# EAGLE board IQModulator_mod (EAGLE 7.6.0)
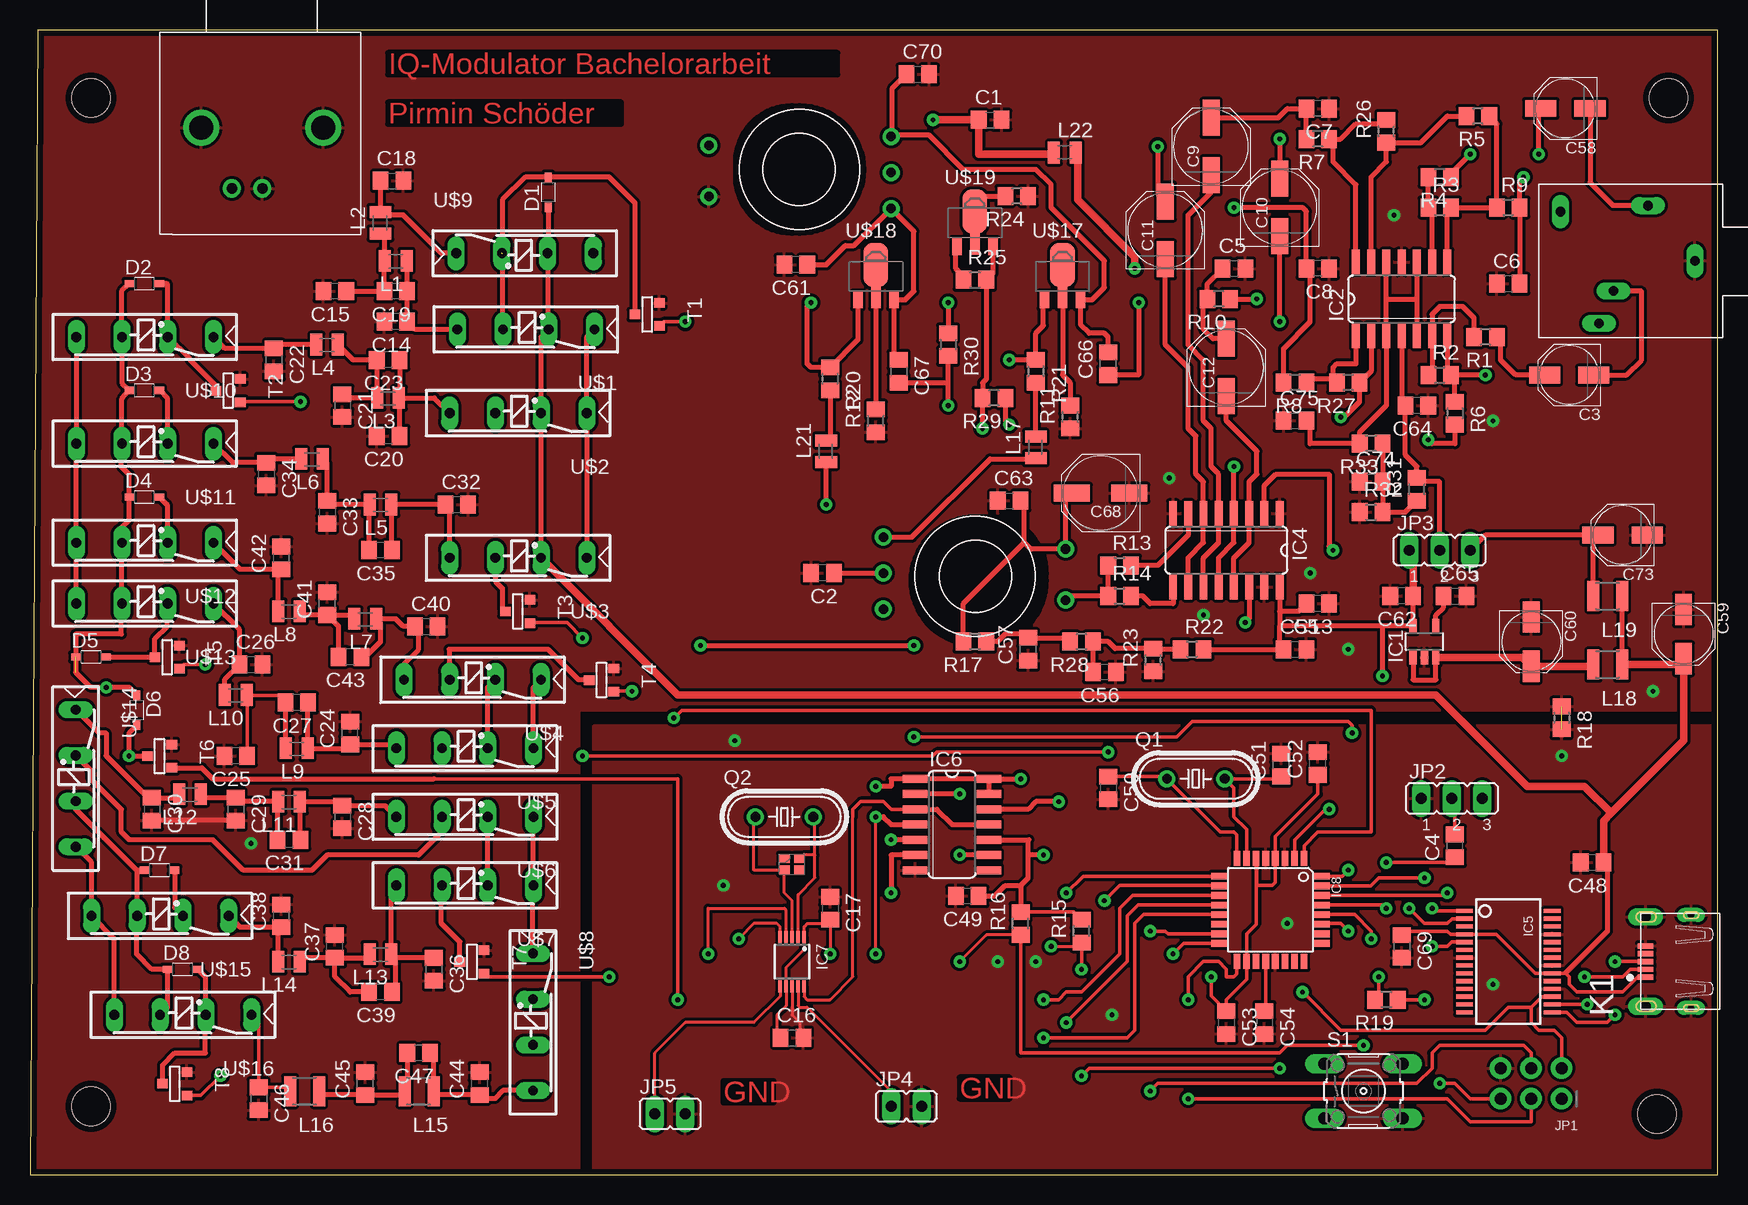
[diagram p0: board, top side]
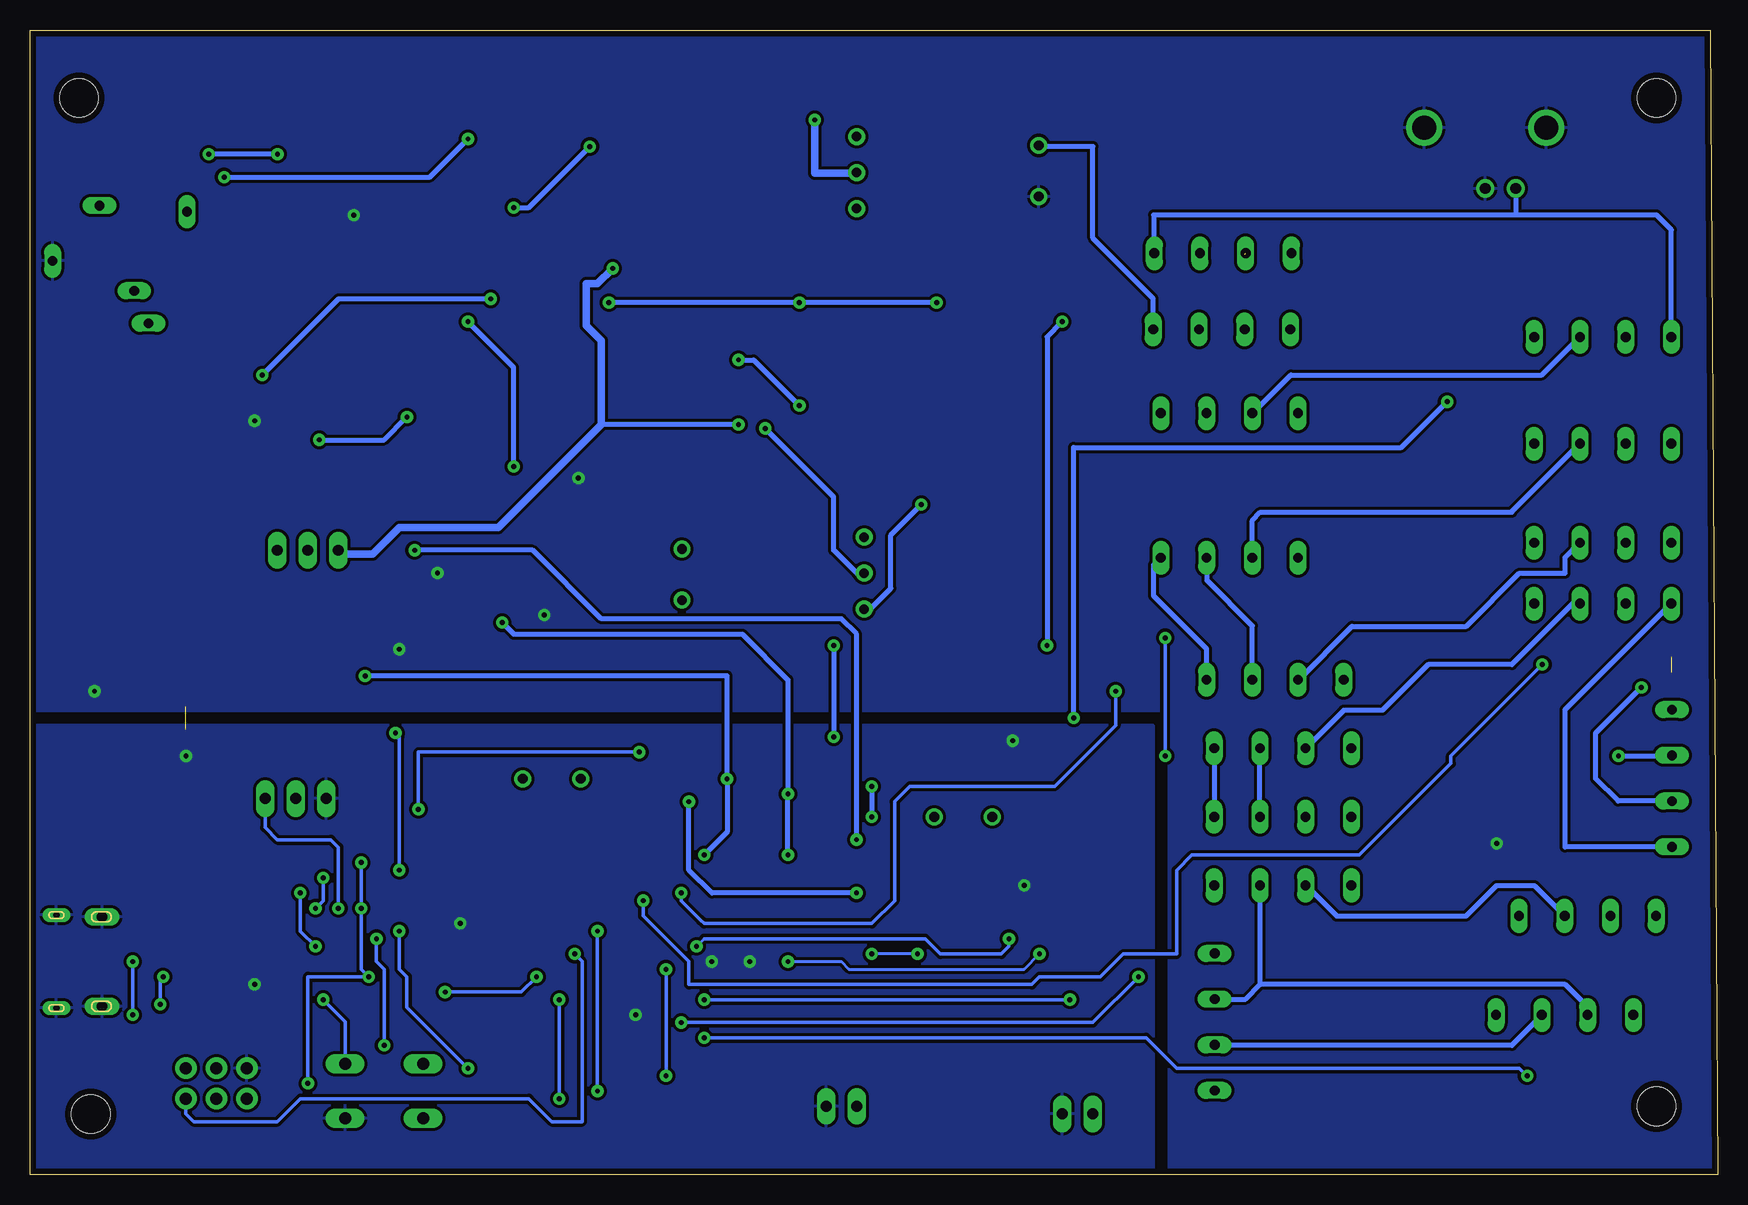
[diagram p1: board, bottom side, seen from below]

Size 140.63 x 95.44 mm. Coordinates in mm from the lower left corner, seen from the top.
Outline: 0,0 140.63,0 140.63,95.44 0.64,95.44 0,0
Copper layers (1*16): Top 0.035mm / dielectric 1.5mm / Bottom 0.035mm
Design rules "LPT_UNIULM *": minimum track width 10mil, minimum drill 16mil, track to track 8mil, track to pad 8mil, pad to pad 8mil, via to via 12mil, smd to smd 0mil, copper to edge 20mil, drill to drill 8mil, minimum pad ring 12mil, minimum via ring 12mil, stop-mask expansion 4mil, vias tented up to drill 0mil, thermal gap 10mil
Holes 3.2 mm at 5.08,5.71 5.08,89.79 136.54,89.79 135.57,5.08
tRestrict: area 59.1,78.7 to 69.2,88.9; area 73.7,44.5 to 84.5,54.6

## Footprints (pad centres in the part's own frame; a part is rotated, then mirrored left to right if it is on the bottom)
C0805 = smd 1.3 x 1.5: 1 -0.95,0; 2 0.95,0
PANASONIC_C = smd 2.6 x 1.4: + 2.05,0; - -2.05,0
PANASONIC_D = smd 3 x 1.4: + 2.4,0; - -2.4,0
SOD323R_INFINEON = smd 0.8 x 0.6: A 1.25,0; C -1.25,0
SOT-23-5 = smd 0.6 x 1.2: 1 -0.95,-1.306; 2 0,-1.306; 3 0.95,-1.306; 4 0.95,1.306; 5 -0.95,1.306
SO14 = smd 0.66 x 2.032: 1 -3.81,-3.073; 2 -2.54,-3.073; 3 -1.27,-3.073; 4 0,-3.073; 5 1.27,-3.073; 6 2.54,-3.073; 7 3.81,-3.073; 8 3.81,3.073; 9 2.54,3.073; 10 1.27,3.073; 11 0,3.073; 12 -1.27,3.073; 13 -2.54,3.073; 14 -3.81,3.073
SO16 = smd 0.66 x 2.032: 1 -4.445,-3.073; 2 -3.175,-3.073; 3 -1.905,-3.073; 4 -0.635,-3.073; 5 0.635,-3.073; 6 1.905,-3.073; 7 3.175,-3.073; 8 4.445,-3.073; 9 4.445,3.073; 10 3.175,3.073; 11 1.905,3.073; 12 0.635,3.073; 13 -0.635,3.073; 14 -1.905,3.073; 15 -3.175,3.073; 16 -4.445,3.073
SSOP28DB = smd 0.348 x 1.397: 1 -4.225,-3.656; 2 -3.575,-3.656; 3 -2.925,-3.656; 4 -2.275,-3.656; 5 -1.625,-3.656; 6 -0.975,-3.656; 7 -0.325,-3.656; 8 0.325,-3.656; 9 0.975,-3.656; 10 1.625,-3.656; 11 2.275,-3.656; 12 2.925,-3.656; 13 3.575,-3.656; 14 4.225,-3.656; 15 4.225,3.656; 16 3.575,3.656; 17 2.925,3.656; 18 2.275,3.656; 19 1.625,3.656; 20 0.975,3.656; 21 0.325,3.656; 22 -0.325,3.656; 23 -0.975,3.656; 24 -1.625,3.656; 25 -2.275,3.656; 26 -2.925,3.656; 27 -3.575,3.656; 28 -4.225,3.656
10-MSOP = smd 0.3 x 1: 1 -1,-2.05; 2 -0.5,-2.05; 3 0,-2.05; 4 0.5,-2.05; 5 1,-2.05; 6 1,2.05; 7 0.5,2.05; 8 0,2.05; 9 -0.5,2.05; 10 -1,2.05
TQFP32-08 = smd 1.27 x 0.559: 1 -4.293,2.8; 2 -4.293,2; 3 -4.293,1.2; 4 -4.293,0.4; 5 -4.293,-0.4; 6 -4.293,-1.2; 7 -4.293,-2; 8 -4.293,-2.8; 17 4.293,-2.8; 18 4.293,-2; 19 4.293,-1.2; 20 4.293,-0.4; 21 4.293,0.4; 22 4.293,1.2; 23 4.293,2; 24 4.293,2.8 | smd 0.559 x 1.27: 9 -2.8,-4.293; 10 -2,-4.293; 11 -1.2,-4.293; 12 -0.4,-4.293; 13 0.4,-4.293; 14 1.2,-4.293; 15 2,-4.293; 16 2.8,-4.293; 25 2.8,4.293; 26 2,4.293; 27 1.2,4.293; 28 0.4,4.293; 29 -0.4,4.293; 30 -1.2,4.293; 31 -2,4.293; 32 -2.8,4.293
2X03_ROUND_70MIL = drill 1 pad 1.778: 1 -2.54,1.27; 2 -2.54,-1.27; 3 0,1.27; 4 0,-1.27; 5 2.54,1.27; 6 2.54,-1.27
JP2 = drill 0.914 long: 1 -2.54,0; 2 0,0; 3 2.54,0
JP1 = drill 0.914 long: 1 0,-1.27; 2 0,1.27
629105150521 = smd 0.45 x 1.3: 1 -1.3,3.8; 2 -0.65,3.8; 3 0,3.8; 4 0.65,3.8; 5 1.3,3.8 | drill 0.85 pad 1.2 long: Z1 -3.725,3.8; Z2 3.725,3.8 | drill 0.55 pad 0.9 long: Z3 3.875,0; Z4 -3.875,0
L0805 = smd 1 x 1.8: P$1 -0.9,0; P$2 0.9,0
L1008 = smd 1 x 2.5: P$1 -1.24,0; P$2 1.173,0
HC49/S = drill 0.813: 1 -2.413,0; 2 2.413,0
R0805 = smd 1.3 x 1.5: 1 -0.95,0; 2 0.95,0
B3F-10XX = drill 1.016 long: 1 -3.251,2.261; 2 3.251,2.261; 3 -3.251,-2.261; 4 3.251,-2.261
SOT-23 = smd 0.787 x 0.889: 1 0.025,-1.016; 2 -0.94,1.016; 3 0.991,1.016
REED_RELAY = drill 0.813 long: 1 -13.38,1.905; 2 -9.57,1.905; 3 -5.76,1.905; 4 -1.95,1.905
SOT-89 = smd 0.8 x 1.4: B -1.499,-1.981; E 1.499,-1.981 | smd 0.8 x 1.9: C 0,-1.727 | smd 2.032 x 3.65: C@1 0,0.94
TRAFO_MID_ZAPF = drill 0.8: PRIMARY_BOTTOM -13.914,-2.008; PRIMARY_TOP -13.914,2.254; SECONDARY1 1.27,3; SECONDARY2 1.27,-3; SECONDARY_MID 1.27,0
CE-BNC-ANGLE = drill 0.9: GND 5.08,-5.08; SIGNAL 2.54,-5.08 | drill 2: P$1 0,0; P$2 10.16,0
KBS-35 = drill 0.8 long: 1 5.4,0; 2 13.4,5.2; 3 9.3,-4.6; 4 12.2,2.5; 5 16.6,-4.1
C20 = smd 0.875 x 0.775: 1 0,0; 2 1.275,0; 3 1.275,0.975; 4 0,0.975

## Placement (x,y rotation side)
C1  1u  [C0805]  80.01,87.95 0 top
C2  100n  [C0805]  66.04,50.16 180 top
C3  47u  [PANASONIC_C]  128.27,66.67 180 top
C4  100n  [C0805]  118.75,27.43 90 top
C5  100n  [C0805]  100.33,75.56 0 top
C6  100n  [C0805]  123.19,74.3 0 top
C7  100n  [C0805]  107.31,88.9 180 top
C8  100n  [C0805]  107.31,75.56 180 top
C9  470u  [PANASONIC_D]  98.42,85.72 90 top
C10  470u  [PANASONIC_D]  104.14,80.64 90 top
C11  470u  [PANASONIC_D]  94.61,78.74 90 top
C12  470u  [PANASONIC_D]  99.69,67.31 90 top
C13  1u  [C0805]  107.31,47.62 180 top
C14  68p  [C0805]  30.48,71.12 180 top
C15  100p  [C0805]  25.4,73.66 180 top
C16  1u  [C0805]  63.5,11.43 0 top
C17  1u  [C0805]  66.67,22.23 270 top
C18  68p  [C0805]  30.16,82.87 0 top
C19  15p  [C0805]  30.48,73.66 180 top
C20  150p  [C0805]  29.84,61.59 180 top
C21  220  [C0805]  26.04,64.14 270 top
C22  150p  [C0805]  20.32,67.94 270 top
C23  22p  [C0805]  29.84,67.94 180 top
C24  1n  [C0805]  26.67,36.83 90 top
C25  1.5n  [C0805]  17.14,34.92 180 top
C26  1n  [C0805]  18.41,42.55 0 top
C27  68p  [C0805]  22.23,39.37 180 top
C28  2.2n  [C0805]  26.04,29.84 270 top
C29  3.3n  [C0805]  17.14,30.48 270 top
C30  2.2n  [C0805]  10.16,30.48 270 top
C31  100p  [C0805]  21.59,27.94 180 top
C32  330p  [C0805]  35.56,55.88 0 top
C33  470p  [C0805]  24.77,55.24 270 top
C34  330p  [C0805]  19.68,58.42 270 top
C35  25p  [C0805]  29.21,52.07 180 top
C36  3.3n  [C0805]  33.66,17.14 270 top
C37  6.8n  [C0805]  25.4,19.05 90 top
C38  3.3n  [C0805]  20.95,21.59 90 top
C39  150p  [C0805]  29.21,15.24 180 top
C40  470p  [C0805]  33.02,45.72 0 top
C41  1n  [C0805]  24.77,47.62 90 top
C42  470p  [C0805]  20.95,51.44 90 top
C43  33p  [C0805]  26.67,43.18 180 top
C44  6.8n  [C0805]  37.47,7.62 90 top
C45  10n  [C0805]  27.94,7.62 90 top
C46  6.8n  [C0805]  19.05,6.35 270 top
C47  220p  [C0805]  32.38,10.16 180 top
C48  4.7u  [C0805]  130.18,26.04 180 top
C49  1u  [C0805]  78.11,23.24 180 top
C50  15p  [C0805]  89.85,32.26 270 top
C51  15p  [C0805]  104.27,34.16 90 top
C52  4.7u  [C0805]  107.31,34.29 90 top
C53  100n  [C0805]  99.69,12.7 270 top
C54  100n  [C0805]  102.87,12.7 270 top
C55  100n  [C0805]  105.41,43.81 0 top
C56  4.7u  [C0805]  89.53,41.91 180 top
C57  100n  [C0805]  83.19,43.81 90 top
C58  47u  [PANASONIC_C]  127.95,88.9 180 top
C59  47u  [PANASONIC_C]  137.79,45.09 270 top
C60  47u  [PANASONIC_C]  125.09,44.45 270 top
C61  1p  [C0805]  63.82,75.88 180 top
C62  4.7u  [C0805]  114.3,48.26 180 top
C63  100n  [C0805]  81.6,56.2 0 top
C64  100n  [C0805]  115.57,64.14 180 top
C65  10n  [C0805]  118.75,48.26 0 top
C66  1p  [C0805]  89.85,67.63 90 top
C67  1p  [C0805]  72.39,66.99 270 top
C68  470u  [PANASONIC_D]  89.22,56.83 180 top
C69  100n  [C0805]  114.3,19.05 270 top
C70  1p  [C0805]  73.98,91.76 0 top
C73  47u  [PANASONIC_C]  132.72,53.34 180 top
C74  4.7u  [C0805]  111.76,57.78 0 top
C75  100n  [C0805]  105.41,62.87 0 top
D1  [SOD323R_INFINEON]  43.18,81.92 90 top
D2  [SOD323R_INFINEON]  9.53,74.3 0 top
D3  [SOD323R_INFINEON]  9.53,65.41 0 top
D4  [SOD323R_INFINEON]  9.53,56.52 0 top
D5  [SOD323R_INFINEON]  5.08,43.18 0 top
D6  [SOD323R_INFINEON]  8.89,38.73 270 top
D7  [SOD323R_INFINEON]  10.79,25.4 0 top
D8  [SOD323R_INFINEON]  12.7,17.14 0 top
IC1  LP2992  [SOT-23-5]  116.2,44.45 0 top
IC2  TLV2464CDD  [SO14]  114.3,73.03 0 top
IC4  SN74CBTLV3253D  [SO16]  99.69,52.07 180 top
IC5  FT232RL-FULLSSOP  [SSOP28DB]  123.19,17.78 270 top
IC6  74AC74D  [SO14]  76.83,29.21 270 top
IC7  SI5351A_DEVICE_SMD  [10-MSOP]  63.5,17.78 180 top
IC8  MEGA8-AI  [TQFP32-08]  103.38,22.1 270 top
JP1  [2X03_ROUND_70MIL]  125.09,7.62 180 top
JP2  [JP2]  118.49,31.37 0 top
JP3  [JP2]  117.47,52.07 0 top
JP4  [JP1]  73.03,5.71 270 top
JP5  [JP1]  53.34,5.08 270 top
K1  [629105150521]  138.43,17.78 90 top
L1  180n  [L0805]  30.48,76.2 180 top
L2  180n  [L0805]  29.21,79.38 90 top
L3  390n  [L0805]  29.84,64.77 180 top
L4  390n  [L0805]  24.77,69.22 180 top
L5  820n  [L0805]  29.21,55.88 180 top
L6  820n  [L0805]  23.5,59.69 180 top
L7  1.5u  [L0805]  27.94,46.35 180 top
L8  1.5u  [L0805]  21.59,46.99 180 top
L9  2.7u  [L0805]  22.23,35.56 180 top
L10  2.7u  [L0805]  17.14,40.01 180 top
L11  4.7u  [L0805]  21.59,31.11 180 top
L12  4.7u  [L0805]  13.34,31.75 180 top
L13  10u  [L0805]  29.21,18.41 180 top
L14  10u  [L0805]  21.59,17.78 180 top
L15  15u  [L1008]  32.38,6.99 180 top
L16  15u  [L1008]  22.86,6.99 180 top
L17  30n  [L0805]  83.82,60.64 90 top
L18  10u  [L1008]  131.44,42.55 180 top
L19  10u  [L1008]  131.44,48.26 180 top
L21  30n  [L0805]  66.36,60.33 90 top
L22  10u  [L0805]  86.23,85.22 0 top
Q1  16MHz  [HC49/S]  97.16,33.02 0 top
Q2  25MHz  [HC49/S]  62.87,29.84 0 top
R1  10k  [R0805]  121.28,69.85 180 top
R2  15k  [R0805]  117.47,66.67 0 top
R3  15k  [R0805]  117.47,80.64 0 top
R4  10k  [R0805]  117.47,83.19 180 top
R5  10k  [R0805]  120.65,88.27 180 top
R6  10k  [R0805]  118.75,63.5 270 top
R7  4.7  [R0805]  107.31,86.36 180 top
R8  4.7  [R0805]  105.41,66.04 180 top
R9  4.7  [R0805]  123.19,80.64 0 top
R10  4.7  [R0805]  99.06,73.03 180 top
R11  0.5  [R0805]  86.68,63.18 90 top
R12  0.5  [R0805]  70.48,62.87 90 top
R13  91  [R0805]  90.81,50.8 0 top
R14  91  [R0805]  90.81,48.26 0 top
R15  10k  [R0805]  87.63,20.32 90 top
R16  10k  [R0805]  82.55,20.95 90 top
R17  500  [R0805]  78.74,44.45 180 top
R18  0  [R0805]  127.64,38.1 270 top
R19  100  [R0805]  113.03,14.61 180 top
R20  5  [R0805]  66.67,66.36 270 top
R21  5  [R0805]  83.82,66.99 270 top
R22  4.7k  [R0805]  96.84,43.81 0 top
R23  4.7k  [R0805]  93.6,42.93 90 top
R24  0.5  [R0805]  82.23,81.6 180 top
R25  5  [R0805]  78.74,74.61 0 top
R26  10k  [R0805]  113.03,87 90 top
R27  10k  [R0805]  109.86,66.04 180 top
R28  100  [R0805]  87.63,44.45 180 top
R29  120  [R0805]  80.33,64.77 180 top
R30  90  [R0805]  76.52,69.22 270 top
R31  4.7k  [R0805]  115.57,57.15 90 top
R32  4.7k  [R0805]  111.76,55.24 0 top
R33  100  [R0805]  111.76,60.96 180 top
S1  [B3F-10XX]  111.12,6.99 0 top
T1  [SOT-23]  51.44,71.75 270 top
T2  [SOT-23]  16.51,65.41 270 top
T3  [SOT-23]  40.64,46.99 270 top
T4  [SOT-23]  47.62,41.27 270 top
T5  [SOT-23]  11.43,43.18 270 top
T6  [SOT-23]  10.79,34.92 270 top
T7  [SOT-23]  36.83,17.78 270 top
T8  [SOT-23]  12.06,7.62 270 top
U$1  REED_REL  [REED_RELAY]  33.66,72.39 180 top
U$2  REED_REL  [REED_RELAY]  33.02,65.41 180 top
U$3  REED_REL  [REED_RELAY]  33.02,53.34 180 top
U$4  REED_REL  [REED_RELAY]  29.21,43.18 180 top
U$5  REED_REL  [REED_RELAY]  28.57,37.47 180 top
U$6  REED_REL  [REED_RELAY]  28.57,31.75 180 top
U$7  REED_REL  [REED_RELAY]  28.57,26.04 180 top
U$8  REED_REL  [REED_RELAY]  40.01,5.08 270 top
U$9  REED_REL  [REED_RELAY]  48.9,74.93 0 top
U$10  REED_REL  [REED_RELAY]  1.91,71.75 180 top
U$11  REED_REL  [REED_RELAY]  1.91,62.87 180 top
U$12  REED_REL  [REED_RELAY]  1.91,54.61 180 top
U$13  REED_REL  [REED_RELAY]  1.91,49.53 180 top
U$14  REED_REL  [REED_RELAY]  1.91,25.4 270 top
U$15  REED_REL  [REED_RELAY]  3.17,23.5 180 top
U$16  REED_REL  [REED_RELAY]  5.08,15.24 180 top
U$17  NESG260234  [SOT-89]  86.04,74.93 0 top
U$18  NESG260234  [SOT-89]  70.48,74.93 0 top
U$19  NESG260234  [SOT-89]  78.74,79.38 0 top
U$20  TRAFO_MID_ZAPF  [TRAFO_MID_ZAPF]  72.39,50.16 180 top
U$21  TRAFO_MID_ZAPF  [TRAFO_MID_ZAPF]  70.48,83.57 0 top
U$22  BNC-GEWINKELT  [CE-BNC-ANGLE]  14.29,87.31 0 top
U$23  EBS35_KLINKE  [KBS-35]  144.15,76.2 180 top
U$24  SMD_CRYSTAL  [C20]  62.87,25.4 0 top

## Library data of the parts
C1 C2 C61 C63 C66 C67 C70 IC1 IC2 IC4 L1-L14 L17 L21 L22 R11 R12 R20 R21 R24 R25 R29 R30 U$1-U$24 = _Bachelor-IQModulator
C3-C60 C62 C64 C65 C68 C69 C73-C75 R1-R10 R13-R19 R22 R23 R26-R28 R31-R33 = resistor
D1-D8 = diode
IC5 JP1 = microbuilder
IC6 = 74xx-eu
IC7 = Mischer
IC8 = atmel; MPN: ATMEGA8-16AU; OC_FARNELL: 9171371; OC_NEWARK: 73M8863
JP2-JP5 = jumper
K1 = Input-Output_Connectors_rev15d
L15 L16 L18 L19 = _Bachelor_IQ_Mischer
Q1 Q2 = crystal; OC_FARNELL: 1667008; OC_NEWARK: unknown
S1 = switch-omron; MPN: B3F-1000; OC_FARNELL: 176432; OC_NEWARK: 36M3542
T1-T8 = zetex; OC_FARNELL: unknown; OC_NEWARK: unknown

## Nets
+3V3: C13.2 C16.1 C17.2 C49.1 C55.1 C62.1 IC1.5 IC4.16 IC6.1 IC6.4 IC6.10 IC6.13 IC6.14 IC7.1 IC7.7 JP3.1 L22.P$2 R15.2 R16.2 R22.2 R29.1
+5V: C48.1 C59.+ C69.1 D1.C D2.C D3.C D4.C D5.C D6.C D7.C D8.C IC5.4 IC5.20 K1.1 L18.P$1 L19.P$1 U$1.2 U$2.2 U$3.2 U$4.2 U$5.2 U$6.2 U$7.2 U$8.2 U$9.3 U$10.3 U$11.3 U$12.3 U$13.3 U$14.3 U$15.3 U$16.3
-I: C12.- IC4.3 IC4.13
-Q: C10.- IC4.4 IC4.12
BIAS: C75.2 IC2.3 IC2.5 IC2.10 IC2.12 R33.2
CLEAN_5V: C73.+ JP3.3 L19.P$2
CLK1: IC4.2 IC6.5
CLK2: IC4.14 IC6.2 IC6.9
CONTROL1: IC8.32 T1.3
CONTROL2: IC8.1 T2.3
CONTROL3: IC8.2 T3.3
CONTROL4: IC8.9 T4.3
CONTROL5: IC8.10 T5.3
CONTROL6: IC8.11 T6.3
CONTROL7: IC8.12 T7.3
CONTROL8: IC8.13 T8.3
D+: IC5.15 K1.3
D-: IC5.16 K1.2
DTR: IC5.2 JP2.3
FIL1_OUT: C18.1 L2.P$2 U$9.1
FIL2_OUT: C22.1 L4.P$2 U$10.1
FIL3_OUT: C34.1 L6.P$2 U$11.1
FIL4_OUT: C42.1 L8.P$2 U$12.1
FIL5_OUT: C26.1 L10.P$2 U$13.1
FIL6_OUT: C30.1 L12.P$2 U$14.1
FIL7_OUT: C38.1 L14.P$2 U$15.1
FIL8_OUT: C46.1 L16.P$2 U$16.1
FILTER1: C14.1 C19.1 L1.P$1 U$1.4
FILTER2: C20.1 C23.1 L3.P$1 U$2.4
FILTER3: C32.1 C35.1 L5.P$1 U$3.4
FILTER4: C40.1 C43.1 L7.P$1 U$4.4
FILTER5: C24.1 C27.1 L9.P$1 U$5.4
FILTER6: C28.1 C31.1 L11.P$1 U$6.4
FILTER7: C36.1 C39.1 L13.P$1 U$7.4
FILTER8: C44.1 C47.1 L15.P$1 U$8.4
GND: C1.2 C2.2 C5.2 C6.1 C7.1 C8.1 C13.1 C14.2 C15.2 C16.2 C17.1 C18.2 C20.2 C21.2 C22.2 C24.2 C25.2 C26.2 C28.2 C29.2 C30.2 C32.2 C33.2 C34.2 C36.2 C37.2 C38.2 C40.2 C41.2 C42.2 C44.2 C45.2 C46.2 C48.2 C49.2 C50.2 C51.2 C52.2 C53.2 C54.2 C55.2 C56.1 C57.1 C59.- C60.- C61.2 C62.2 C63.1 C64.1 C65.2 C68.- C69.2 C70.2 C73.- C74.1 C75.1 IC1.2 IC2.11 IC4.1 IC4.8 IC4.15 IC5.7 IC5.18 IC5.21 IC5.25 IC6.7 IC7.8 IC8.3 IC8.5 IC8.21 JP1.6 JP2.1 JP4.2 JP5.2 K1.5 K1.Z1 K1.Z2 K1.Z3 K1.Z4 R11.1 R12.1 R18.1 R18.2 R23.1 R24.1 R32.1 S1.4 T1.2 T2.2 T3.2 T4.2 T5.2 T6.2 T7.2 T8.2 U$21.PRIMARY_BOTTOM U$22.GND U$22.P$1 U$22.P$2 U$23.1
I: C11.- IC4.6 IC4.10
I_IN: C3.- U$23.4
LOAD: U$9.4 U$10.4 U$11.4 U$12.4 U$13.4 U$14.4 U$15.4 U$16.4 U$22.SIGNAL
N$1: C57.2 R17.1 R28.2
N$2: C3.+ R1.1
N$3: IC2.6 R1.2 R2.1
N$4: C58.+ R4.1
N$5: IC2.9 R3.1 R4.2
N$6: IC2.8 R3.2 R5.1 R9.1
N$7: IC2.13 R5.2 R26.1
N$8: IC2.7 R2.2 R6.1 R10.1
N$9: IC2.2 R6.2 R27.1
N$10: IC2.1 R8.1 R27.2
N$11: IC2.14 R7.1 R26.2
N$12: C5.1 C12.+ R10.2
N$13: C6.2 C10.+ R9.2
N$14: C7.2 C9.+ R7.2
N$15: C8.2 C11.+ R8.2
N$16: IC4.7 R13.2
N$17: IC4.9 R14.2
N$18: C15.1 C19.2 L1.P$2 L2.P$1
N$19: C51.1 IC8.7 Q1.2
N$20: C21.1 C23.2 L3.P$2 L4.P$1
N$21: IC6.6 IC6.12
N$22: IC7.3 Q2.1 U$24.1
N$23: IC7.2 Q2.2 U$24.3
N$25: C4.2 JP2.2
N$26: R19.1 S1.2
N$27: C25.1 C27.2 L9.P$2 L10.P$1
N$28: C50.1 IC8.8 Q1.1
N$29: C29.1 C31.2 L11.P$2 L12.P$1
N$30: D6.A T6.1 U$6.3 U$14.2
N$31: C33.1 C35.2 L5.P$2 L6.P$1
N$32: C54.1 IC8.20
N$33: C37.1 C39.2 L13.P$2 L14.P$1
N$34: IC7.9 JP4.1
N$35: C41.1 C43.2 L7.P$2 L8.P$1
N$36: C56.2 R22.1 R23.2 R28.1
N$37: C45.1 C47.2 L15.P$2 L16.P$1
N$38: D1.A T1.1 U$1.3 U$9.2
N$39: D5.A T5.1 U$5.3 U$13.2
N$40: D7.A T7.1 U$7.3 U$15.2
N$41: IC7.6 JP5.1
N$42: C65.1 IC1.4
N$43: D4.A T4.1 U$4.3 U$12.2
N$44: R11.2 U$17.C
N$45: D3.A T3.1 U$3.3 U$11.2
N$46: D8.A T8.1 U$8.3 U$16.2
N$47: D2.A T2.1 U$2.3 U$10.2
N$48: C66.2 C70.1 U$17.E U$21.SECONDARY1
N$49: C61.1 C67.1 U$18.E U$21.SECONDARY2
N$51: C74.2 R31.1 R32.2 R33.1
N$54: C64.2 IC2.4 JP3.2 R31.2
N$56: R12.2 U$18.C
N$59: C67.2 R21.1 R30.2 U$17.B
N$60: C66.1 R20.1 R30.1 U$18.B
N$61: R24.2 U$19.C
N$62: R25.1 U$19.B
N$63: C2.1 R25.2 R29.2 U$19.E U$20.SECONDARY_MID
N$64: L21.P$2 R20.2
N$65: L17.P$2 R21.2
N$66: L21.P$1 U$20.SECONDARY1
N$67: L17.P$1 U$20.SECONDARY2
N$68: C1.1 L22.P$1 U$21.SECONDARY_MID
N$69: C60.+ IC1.1 IC1.3 L18.P$2
OFFSET: C63.2 C68.+ R17.2 U$20.PRIMARY_BOTTOM
PA_IN: R13.1 R14.1 U$20.PRIMARY_TOP
PA_OUT: U$1.1 U$2.1 U$3.1 U$4.1 U$5.1 U$6.1 U$7.1 U$8.1 U$21.PRIMARY_TOP
PB3: IC8.15 JP1.4
PB4: IC8.16 JP1.1
PB5: IC8.17 JP1.3
Q: C9.- IC4.5 IC4.11
Q_IN: C58.- U$23.3
RESET: C4.1 IC8.29 JP1.5 R19.2
RX: IC5.5 IC8.30
SCL: IC7.4 IC8.28 R16.1
SDA: IC7.5 IC8.27 R15.1
SI4F: IC6.3 IC6.11 IC7.10
TX: IC5.1 IC8.31
UC_VCC: C52.1 C53.1 IC5.17 IC8.4 IC8.6 IC8.18 JP1.2

## Tracks (layer width: path | path; a pad name or v marks a point on that pad's centre or on a via)
+3V3  (via drill 0.41)
  Top 0.254: C16.1 62.23,11.75 62.23,13.34 63,14.11 IC7.7 63,17.28 64.5,18.78 IC7.1 64.5,20.68 64.77,20.95 66.36,20.95 C17.2 v66.67,18.41 | v70.48,18.41 v70.48,29.84
  Top 0.305: R16.2 87,21.91 R15.2
  Top 0.406: IC6.10 83.25,27.94 83.19,27.87 83.19,26.67 | 83.19,26.67 83.19,24.77 82.55,24.13 | IC6.14 v82.55,33.02 | v84.45,26.67 83.19,26.67 | IC6.14 IC6.13 | IC6.14 IC6.1 71.75,33.02 71.75,32.38 v70.48,32.38 | v70.48,29.84 71.12,29.84 71.75,29.21 IC6.4 | 82.55,24.13 R16.2 | C49.1 80.39,23.24 81.28,24.13 82.55,24.13 | C62.1 IC1.5 112.71,45.76 | IC4.16 104.14,46.99 | 104.14,46.99 104.14,45.72 | 112.71,45.76 104.18,45.76 104.14,45.72 | 104.14,45.72 104.14,43.88 104.14,44.13 C55.1 R22.2 | R29.1 81.28,62.87 v81.6,62.55 | v112.71,41.59 112.71,45.76 | 104.14,46.99 105.73,46.99 C13.2
  Top 0.61: v92.08,75.56 92.08,76.52 87.31,81.28 87.31,85.04 L22.P$2 | C62.1 115.25,51.76 JP3.1
  Bottom 0.254: v66.67,18.41 v70.48,18.41
  Bottom 0.406: v84.45,26.67 82.55,28.57 v82.55,33.02 82.55,41.59 v112.71,41.59 | v70.48,32.38 v70.48,29.84 | v81.6,62.55 93.03,62.55
  Bottom 0.61: v92.08,75.56 93.34,74.3 94.3,74.3 94.3,70.8 93.03,69.53 93.03,62.55 101.6,53.98 109.86,53.98 112.08,51.75 114.62,51.75 JP3.1
+5V  (via drill 0.41)  (1 unrouted)
  Top 0.305: 127.97,16.8 IC5.20 125.44,16.8 122.19,20.05 IC5.4 118.38,20.05 118.11,20.32 114.62,20.32 C69.1 114.36,20.05 | 127.97,16.8 128.27,16.51 128.27,15.88 128.91,15.24 132.72,15.24 133.99,16.51 134.6,16.51 K1.1 | 127.97,16.8 127.97,16.85 | 131.44,25.71 C48.1
  Top 0.406: 131.44,25.71 131.44,20.32 127.97,16.85 | U$3.2 U$2.2 42.59,69.85 U$1.2 43.13,70.58 U$9.3 43.18,76.88 D1.C | U$5.2 38.15,40.64 U$4.2 | U$7.2 U$6.2 | 137.31,42.55 C59.+ | L18.P$1 L19.P$1 | D6.C 8.89,40.01 8.26,40.64 v6.35,40.64 5.07,40.64 3.81,41.9 3.81,45.09 7.62,45.09 7.62,47.58 U$13.3 U$12.3 7.67,54.02 8.26,54.61 8.26,56.49 D4.C 8.28,58.4 7.62,59.05 7.62,60.91 U$11.3 7.67,64.72 D3.C 7.67,66.02 U$10.3 7.62,69.89 7.62,73.66 8.26,74.3 D2.C | D7.C 8.89,25.4 | 8.89,25.4 3.81,30.48 U$14.3 | 8.89,25.4 8.94,25.36 U$15.3 8.89,21.55 8.89,18.41 10.16,17.14 D8.C 11.45,13.95 U$16.3
  Top 0.61: C48.1 131.12,29.52 131.76,30.16 | 131.76,30.16 137.79,36.2 137.79,42.55 | 137.79,42.55 C59.+ | 131.76,30.16 129.54,32.38 124.78,32.38 117.16,40.01 53.98,40.01 48.26,45.72 48.26,45.77 U$3.2 | L18.P$1 137.79,42.55
  Bottom 0.406: U$4.2 38.78,45.77 42.55,49.53 42.55,51.39 U$3.2 | U$8.2 39.33,14.65 38.1,15.88 | 38.1,15.88 38.1,24.09 U$7.2 | U$14.3 8.3,31.16 10.16,33.02 10.16,36.83 v6.35,40.64 | U$16.3 10.84,14.02 12.7,15.88 38.1,15.88 | U$6.2 U$5.2
-I
  Top 0.406: 99.69,63.5 C12.- 99.69,62.87 102.23,60.33 102.23,58.42 101.6,57.78 IC4.3 101.6,52.7 100.33,51.44 IC4.13
-Q  (via drill 0.41)
  Top 0.406: v100.33,59.05 IC4.4 100.33,52.7 99.06,51.44 IC4.12 | v104.14,71.12 C10.-
  Bottom 0.406: v100.33,59.05 100.33,67.31 v104.14,71.12
BIAS
  Top 0.406: 113.03,73.03 IC2.3 113.03,64.14 110.81,61.91 R33.2 106.68,60.96 106.68,62.55 C75.2 | 113.03,73.03 IC2.12 | IC2.10 115.57,73.03 | 115.57,73.03 IC2.5 | 113.03,73.03 115.57,73.03
CLEAN_5V
  Top 0.406: L19.P$2 130.27,52.95 C73.+ 121.28,53.34 JP3.3
CLK1  (via drill 0.41)
  Top 0.406: IC6.5 v71.75,27.94 | IC4.2 102.87,57.47 103.82,58.42 108.27,58.42 108.27,52.39 v108.58,52.07
  Bottom 0.406: v71.75,27.94 71.75,45.09 73.03,46.35 93.03,46.35 98.74,52.07 v108.58,52.07
CLK2  (via drill 0.41)
  Top 0.406: IC6.9 v77.47,26.67 | v77.47,31.75 IC6.2 | IC4.14 101.6,46.35 v101.28,46.04
  Bottom 0.406: v77.47,26.67 v77.47,31.75 77.47,41.27 81.28,45.09 100.33,45.09 v101.28,46.04
CONTROL1  (via drill 0.41)
  Top 0.305: IC8.32 109.35,24.9 v109.86,25.4 | v54.61,71.12 52.81,71.12 T1.3 | v110.17,36.83 110.17,37.47 109.86,37.78 96.84,37.78 95.57,36.51 v73.66,36.51
  Top 0.406: v55.88,44.13 v73.66,44.13
  Bottom 0.305: v109.86,25.4 109.86,36.51 v110.17,36.83
  Bottom 0.406: v55.88,44.13 55.88,69.85 v54.61,71.12 | v73.66,44.13 v73.66,36.51
CONTROL2  (via drill 0.41)
  Top 0.305: IC8.1 106.18,27.44 107.31,28.57 111.76,28.57 111.76,38.73 54.29,38.73 v53.66,38.1 | v22.54,64.45 17.56,64.45 T2.3
  Bottom 0.406: v53.66,38.1 53.66,60.64 26.35,60.64 v22.54,64.45
CONTROL3  (via drill 0.41)
  Top 0.305: IC8.2 105.38,27.91 107.95,30.48 v108.27,30.48 | v89.85,35.24 75.56,35.24 75.25,34.92 v46.04,34.92 | v46.04,44.77 44.77,46.04 41.69,46.04 T3.3
  Bottom 0.305: v108.27,30.48 108.27,35.24 v89.85,35.24 | v46.04,34.92 v46.04,44.77
CONTROL4  (via drill 0.41)
  Top 0.305: IC8.9 87.76,24.9 v86.36,23.5 | 48.9,40.03 T4.3 48.68,40.32 v50.16,40.32
  Bottom 0.305: v86.36,23.5 86.36,22.86 84.77,21.27 84.45,20.95 70.48,20.95 68.58,22.86 68.58,31.11 67.31,32.38 55.24,32.38 50.16,37.47 v50.16,40.32
CONTROL5  (via drill 0.41)
  Top 0.305: v89.53,22.86 90.81,24.13 99.05,24.13 IC8.10 | v14.61,42.55 12.8,42.55 T5.3
  Bottom 0.305: v89.53,22.86 89.53,21.59 85.72,17.78 85.72,15.88 57.15,15.88 56.52,16.51 51.44,16.51 49.53,18.41 45.09,18.41 45.09,25.4 43.81,26.67 29.84,26.67 22.23,34.29 22.23,34.92 v14.61,42.55
CONTROL6  (via drill 0.41)
  Top 0.305: IC8.11 91.88,23.3 90.81,22.23 90.81,18.41 87.63,15.24 86.36,15.24 85.72,14.61 v84.45,14.61 | v53.98,14.61 53.98,33.02 33.66,33.02
  Top 0.406: T6.3 14.33,33.93 15.24,33.02 33.66,33.02
  Bottom 0.305: v84.45,14.61 v53.98,14.61
CONTROL7  (via drill 0.41)
  Top 0.305: IC8.12 92.35,22.5 91.44,21.59 91.44,17.78 v86.36,12.7 | v48.26,16.51 38.12,16.51 T7.3
  Bottom 0.305: v86.36,12.7 52.07,12.7 v48.26,16.51
CONTROL8  (via drill 0.41)
  Top 0.305: IC8.13 92.82,21.7 92.08,20.95 92.08,12.06 91.44,11.43 v84.45,11.43 | T8.3 14.25,6.63 v15.88,8.26
  Bottom 0.305: v84.45,11.43 47.62,11.43 45.09,8.89 16.51,8.89 v15.88,8.26
D+  (via drill 0.41)
  Top 0.305: v132.08,17.78 K1.3 | IC5.15 128.05,13.55 128.91,12.7 131.44,12.7 v132.08,13.34
  Bottom 0.305: v132.08,13.34 v132.08,17.78
D-  (via drill 0.41)
  Top 0.305: IC5.16 v129.78,14.21 | v129.54,16.51 132.72,16.51 133.35,17.14 134.62,17.14 K1.2
  Bottom 0.305: v129.78,14.21 129.78,16.27 v129.54,16.51
DTR  (via drill 0.41)
  Top 0.305: IC5.2 118.51,21.36 118.11,20.95 116.2,20.95 v114.94,22.23
  Bottom 0.305: JP2.3 121.03,28.96 120.02,27.94 115.57,27.94 114.94,27.3 v114.94,22.23
FIL1_OUT
  Top 0.406: U$9.1 34.29,76.83 31.11,80.01 29.48,80.01 L2.P$2 C18.1
FIL2_OUT
  Top 0.406: L4.P$2 20.64,69.22 C22.1 16.24,68.89 U$10.1
FIL3_OUT
  Top 0.406: L6.P$2 20,59.69 C34.1 16.88,59.37 U$11.1
FIL4_OUT
  Top 0.406: L8.P$2 20.69,50.22 C42.1 17.5,50.48 U$12.1
FIL5_OUT
  Top 0.406: L10.P$2 16.25,41.33 C26.1 17.46,45.45 U$13.1
FIL6_OUT
  Top 0.406: U$14.1 5.76,36.83 6.35,36.83 6.35,34.92 9.53,31.75 9.84,31.75 C30.1 12.12,31.43 L12.P$2
FIL7_OUT
  Top 0.406: L14.P$2 20.69,20.38 C38.1 17.5,20.64 U$15.1
FIL8_OUT
  Top 0.305: L16.P$2 21.37,7.3 C46.1 19.05,12.74 U$16.1
FILTER1
  Top 0.406: U$1.4 32.06,70.48 C14.1 C19.1 31.43,76.15 L1.P$1
FILTER2
  Top 0.406: C20.1 30.8,64.72 L3.P$1 | L3.P$1 33.7,64.77 U$2.4 | C23.1 30.8,64.82 L3.P$1
FILTER3
  Top 0.406: U$3.4 34.97,55.52 C32.1 L5.P$1 30.16,55.83 C35.1
FILTER4
  Top 0.406: C43.1 27.94,43.18 29.21,44.45 29.21,45.98 L7.P$1 30.48,46.35 31.11,45.72 C40.1 32.38,45.41 32.38,43.81 31.16,42.59 U$4.4
FILTER5
  Top 0.406: U$5.4 30.2,35.88 C24.1 26.35,35.56 L9.P$1 23.12,39.32 C27.1
FILTER6
  Top 0.406: C31.1 22.54,31.07 L11.P$1 25.71,31.11 C28.1 29.57,30.8 U$6.4
FILTER7
  Top 0.406: C36.1 30.43,18.09 | 30.43,18.09 L13.P$1 30.11,23.71 U$7.4 | 30.43,18.09 30.43,15.51 C39.1
FILTER8
  Top 0.406: U$8.4 39.41,7.03 38.73,6.35 37.78,6.35 C44.1 33.94,6.67 L15.P$1 33.62,9.87 C47.1
GND  (via drill 0.41)  (1 unrouted)
  Top 0.254: IC7.8 63.5,13.34 64.14,12.7 64.14,11.74 C16.2
  Top 0.406: C29.2 C30.2
  other vias: 127.64,34.92 80.64,17.78 57.78,24.13 104.78,20.95 121.92,15.88 113.67,80.01 135.25,40.32 18.41,27.62 58.74,36.2 97.79,46.67 109.86,43.81 106.68,50.16 121.92,62.87 94.93,58.1 83.82,17.78 90.17,13.34
  pour Top (isolate 0.254): 46.99,37.47 140.65,37.47 140.65,0 46.99,0
  pour Bottom (isolate 0.254): 46.99,37.47 140.65,37.47 140.65,0 46.99,0
  pour Top (isolate 0.254): 0.64,95.25 140.65,95.25 140.65,38.73 45.72,38.73 45.72,0 0,0
  pour Bottom (isolate 0.254): 0.64,95.25 140.65,95.25 140.65,38.73 45.72,38.73 45.72,0 0,0
I
  Top 0.406: C11.- 94.61,69.22 96.52,67.31 96.52,62.23 97.16,61.59 97.16,58.42 97.79,57.78 IC4.6 97.79,52.7 96.52,51.44 IC4.10
I_IN
  Top 0.406: C3.- 133.03,66.67 134.3,67.94 134.3,73.66 131.99,73.66 U$23.4
LOAD
  Top 0.406: U$16.4 7.03,19.68 U$15.4 5.12,26.04 U$14.4 | U$13.4 U$12.4 U$11.4 U$10.4
  Bottom 0.406: U$10.4 3.85,78.78 5.08,80.01 16.83,80.01 | U$14.4 12.65,27.35 12.7,27.3 12.7,38.78 U$13.4 | 16.83,80.01 46.99,80.01 46.99,76.88 U$9.4 | U$22.SIGNAL 16.83,80.01
N$1
  Top 0.406: R28.2 86.36,44.77 C57.2 83.19,45.09 81.28,45.09 80.64,44.45 R17.1
N$2
  Top 0.406: C3.+ 123.83,66.67 122.56,67.94 122.56,69.53 R1.1
N$3
  Top 0.406: R1.2 120.33,71.44 119.38,72.39 117.47,72.39 116.84,71.75 IC2.6 116.84,66.99 R2.1
N$4  (via drill 0.41)
  Top 0.406: R4.1 118.42,83.5 v120.02,85.09 | v125.73,85.09 125.73,88.73 C58.+
  Bottom 0.406: v120.02,85.09 v125.73,85.09
N$5
  Top 0.406: IC2.9 116.84,80.33 R3.1 R4.2
N$6
  Top 0.406: IC2.8 118.11,80.33 R3.2 R9.1 | 122.56,80.64 R9.1 | R9.1 122.24,87.62 R5.1
N$7
  Top 0.406: R26.1 113.67,86.05 | 113.67,86.05 115.89,86.05 118.11,88.27 R5.2 | IC2.13 111.76,83.19 113.03,84.45 113.03,85.41 113.67,86.05
N$8  (via drill 0.41)
  Top 0.406: IC2.7 118.11,66.99 R2.2 | R6.1 118.75,66.36 R2.2 | R10.1 v102.23,73.03 | v121.28,66.67 R2.2
  Bottom 0.406: v102.23,73.03 114.94,73.03 v121.28,66.67
N$9  (via drill 0.41)
  Top 0.406: IC2.2 111.76,67 R27.1 | 110.49,65.72 R27.1 | R6.2 118.75,60.96 116.84,60.96 v116.52,61.28 | R27.1 110.81,64.45 109.54,63.18 v109.22,63.18
  Bottom 0.406: v116.52,61.28 111.12,61.28 v109.22,63.18
N$10
  Top 0.406: IC2.1 110.49,67.63 108.9,67.63 108.58,67.31 108.58,66.36 | 108.58,66.36 R27.2 | 108.58,66.36 106.68,66.36 R8.1
N$11
  Top 0.406: R26.2 112.72,87.63 110.49,87.63 109.22,86.36 R7.1 108.58,86.04 108.58,84.45 110.49,82.55 IC2.14
N$12
  Top 0.406: C5.1 98.11,74.3 R10.2 97.79,72.7 97.79,70.48 98.56,69.71 C12.+
N$13  (via drill 0.41)
  Top 0.406: C6.2 R9.2 124.14,82.86 v124.46,83.19 | v104.14,86.36 C10.+
  Bottom 0.406: v124.46,83.19 107.31,83.19 v104.14,86.36
N$14
  Top 0.406: R7.2 C7.2 104.78,88.9 104,88.12 C9.+
N$15  (via drill 0.41)
  Top 0.406: R8.2 104.46,68.9 106.68,71.12 106.68,75.25 C8.2 106.36,80.33 106.05,80.64 v100.33,80.64 | v93.98,85.72 93.98,81.78 C11.+
  Bottom 0.406: v100.33,80.64 99.06,80.64 v93.98,85.72
N$16
  Top 0.406: IC4.7 96.52,53.34 93.98,50.8 R13.2
N$17
  Top 0.406: 92.08,47.94 R14.2 92.71,48.26 93.34,47.62 95.25,47.62 IC4.9
N$18
  Top 0.406: L2.P$1 29.58,78.11 L1.P$2 29.53,76.15 C19.2 C15.1
N$19
  Top 0.305: IC8.7 101.38,28.8 100.33,29.84 100.33,32.26 Q1.2 104.07,33.02 C51.1
N$20
  Top 0.406: C21.1 26.35,64.77 L3.P$2 28.89,64.82 C23.2 26.93,67.94 L4.P$1
N$21  (via drill 0.41)
  Top 0.406: IC6.6 71.75,26.67 v71.75,23.5 | v85.72,31.11 83.82,31.11 83.19,30.48 IC6.12
  Bottom 0.406: v71.75,23.5 83.82,23.5 85.72,25.4 v85.72,31.11
N$22
  Top 0.254: IC7.3 63.5,22.86 62.87,23.5 U$24.1 60.33,25.4 60.33,29.72 Q2.1
N$23
  Top 0.254: IC7.2 64,23.36 65.41,24.77 65.41,26.67 | 65.41,26.67 64.44,26.67 U$24.3 | 65.41,26.67 65.41,29.72 Q2.2
N$25
  Top 0.305: C4.2 118.75,31.11 JP2.2
N$26  (via drill 0.41)
  Top 0.305: v116.2,14.61 R19.1
  Bottom 0.305: S1.2 114.38,12.78 v116.2,14.61
N$27
  Top 0.305: C25.1 18.09,39.95 | 18.09,39.95 L10.P$1 | 18.09,39.95 20.69,39.95 C27.2
  Top 0.406: C27.2 21.27,35.61 L9.P$2
N$28
  Top 0.305: IC8.8 100.58,28.33 100.33,28.57 99.19,28.57 Q1.1 94.55,33.21 C50.1
N$29
  Top 0.406: C31.2 20.64,31.07 L11.P$2 17.46,31.11 C29.1 14.55,31.43 L12.P$1
N$30  (via drill 0.41)
  Top 0.406: T6.1 8.28,34.9 | 8.28,34.9 v8.26,34.92 | U$6.3 34.34,28.62 32.38,26.67 24.77,26.67 23.5,25.4 17.78,25.4 15.24,27.94 8.26,27.94 7.62,28.57 7.62,30.48 5.08,33.02 5.08,33.7 U$14.2 | 8.28,34.9 8.28,36.88 D6.A
  Bottom 0.406: v8.26,34.92 3.85,34.92 U$14.2
N$31
  Top 0.406: C35.2 28.26,55.83 L5.P$2 25.08,55.88 C33.1 24.77,59.32 L6.P$1
N$32
  Top 0.305: IC8.20 102.98,13.76 C54.1
N$33
  Top 0.406: C39.2 26.67,15.24 25.4,16.51 C37.1 | C37.1 28,18.1 L13.P$2 | C37.1 22.81,18.1 L14.P$1
N$34
  Top 0.254: IC7.9 64,14.11 64.14,13.97 64.77,13.97 71.75,6.99 JP4.1
N$35
  Top 0.406: C43.2 25.72,45.72 C41.1 | C41.1 26.72,46.67 L7.P$2 | C41.1 22.8,46.67 L8.P$1
N$36
  Top 0.406: 88.64,44.39 R28.1 | R22.1 93.66,43.81 R23.2 90.43,43.88 89.85,44.45 R28.1 | R28.1 C56.2
N$37
  Top 0.406: C47.2 31.43,7.21 L15.P$2 30.9,6.67 C45.1 24.41,6.67 L16.P$1
N$38  (1 unrouted)
  Top 0.406: U$1.3 39.41,76.2 | 39.41,76.2 39.41,76.75 | T1.1 50.42,81.03 48.26,83.19 43.2,83.19 D1.A 41.26,83.17 39.37,81.28 39.37,76.25 39.41,76.2
N$39
  Top 0.406: U$13.2 11.43,47.58 11.43,45.72 10.41,44.7 T5.1 10.39,43.18 D5.A
  Bottom 0.406: U$13.2 12.06,47.62 17.14,42.55 24.13,42.55 27.94,38.73 31.16,38.73 U$5.3
N$40
  Top 0.406: T7.1 35.81,19.43 34.29,20.95 34.29,24.09 U$7.3 | D7.A 12.04,22.29 U$15.2
  Bottom 0.406: U$7.3 34.29,24.13 31.75,21.59 20.95,21.59 18.41,24.13 15.24,24.13 15.24,24.09 U$15.2
N$41
  Top 0.254: IC7.6 62.5,14.88 60.33,12.7 54.61,12.7 52.07,10.16 JP5.1
N$42
  Top 0.406: IC1.4 117.16,46.67 117.79,47.31 C65.1
N$43
  Top 0.406: T4.1 46.38,41.25 46.35,41.27 45.72,41.27 43.18,43.81 34.92,43.81 34.92,41.32 U$4.3 | U$12.2 11.47,55.84 11.43,55.88 11.41,55.88 D4.A
  Bottom 0.406: U$4.3 34.92,41.27 30.48,45.72 20.95,45.72 16.51,50.16 12.7,50.16 12.7,51.48 U$12.2
N$44
  Top 0.406: U$17.C 86.04,66.67 86.68,66.04 R11.2
N$45
  Top 0.406: U$3.3 38.78,49.48 39.37,48.9 39.37,47.22 T3.1 | D3.A 10.79,65.41 11.43,64.77 11.43,61.01 U$11.2
  Bottom 0.406: U$3.3 38.78,54.56 38.1,55.24 17.14,55.24 17.14,55.29 U$11.2
N$46
  Top 0.406: T8.1 11.05,9.14 12.06,10.16 14.61,10.16 14.61,13.29 U$16.2 14.61,13.38 14.61,16.51 13.97,17.14 D8.A
  Bottom 0.406: U$16.2 14.65,13.29 17.14,10.79 41.87,10.79 U$8.3
N$47
  Top 0.406: T2.1 15.49,65.79 13.34,67.94 13.34,67.99 U$10.2 11.47,74.25 11.43,74.3 D2.A
  Bottom 0.406: U$2.3 38.73,63.5 35.56,66.67 14.65,66.67 U$10.2
N$48
  Top 0.406: C66.2 89.85,69.85 89.53,70.17 88.27,70.17 87.54,70.89 U$17.E 88.51,72.95 89.53,73.98 89.53,76.2 85.09,80.64 85.09,82.55 83.82,83.82 77.79,83.82 74.93,86.68 71.87,86.68 | 71.87,86.68 U$21.SECONDARY1 | 71.87,86.68 71.87,90.6 C70.1
N$49
  Top 0.406: C67.1 71.98,68.35 U$18.E 72.95,72.95 73.66,73.66 73.66,78.66 U$21.SECONDARY2 | 71.68,80.64 U$21.SECONDARY2 | C61.1 66.36,75.88 67.94,77.47 68.66,77.47 U$21.SECONDARY2
N$51
  Top 0.406: R31.1 114.61,55.24 R32.2 C74.2 R33.1
N$54
  Top 0.406: JP3.2 117.47,57.78 115.89,57.78 R31.2 115.57,59.05 114.62,60.01 C64.2 114.3,64.45 IC2.4
N$56
  Top 0.406: U$18.C R12.2
N$59  (via drill 0.41)
  Top 0.406: U$17.B 84.45,72.86 84.45,70.8 83.82,70.17 R21.1 v81.6,67.94 | C67.2 76.52,66.04 | 76.52,66.04 R30.2 | v76.52,64.14 76.52,66.04
  Bottom 0.406: v81.6,67.94 80.33,67.94 v76.52,64.14
N$60  (via drill 0.41)
  Top 0.406: U$18.B 68.99,69.62 R20.1 65.09,67.31 64.77,67.63 64.77,72.39 v65.09,72.71 | v76.52,72.71 R30.1 | v92.39,72.71 92.39,66.67 C66.1
  Bottom 0.406: v65.09,72.71 v76.52,72.71 v92.39,72.71
N$61
  Top 0.406: U$19.C 78.74,80.96 79.38,81.6 R24.2
N$62
  Top 0.406: R25.1 77.79,74.93 77.15,75.56 77.15,77.31 U$19.B
N$63  (via drill 0.41)
  Top 0.406: U$19.E 80.24,75.16 R25.2 79.69,66.36 79.38,66.04 R29.2 v79.38,62.23 | C2.1 U$20.SECONDARY_MID
  Bottom 0.406: U$20.SECONDARY_MID 71.75,50.16 73.66,52.07 73.66,56.52 v79.38,62.23
N$64
  Top 0.406: R20.2 66.67,61.54 L21.P$2
N$65
  Top 0.406: L17.P$2 R21.2
N$66  (via drill 0.41)
  Top 0.406: v66.36,55.88 L21.P$1
  Bottom 0.406: U$20.SECONDARY1 70.63,47.16 68.9,48.9 68.9,53.34 v66.36,55.88
N$67
  Top 0.406: U$20.SECONDARY2 73.48,53.16 80.01,59.69 83.77,59.69 L17.P$1
N$68  (via drill 0.41)
  Top 0.406: 85.21,85.09 L22.P$1
  Top 0.61: 85.21,85.09 79.06,85.09 C1.1 v75.25,87.95
  Bottom 0.61: v75.25,87.95 75.25,83.5 71.82,83.5 U$21.SECONDARY_MID
N$69
  Top 0.406: IC1.1 115.25,41.28 115.25,41.27 117.16,41.27 IC1.3
  Top 0.61: L18.P$2 130.13,42.4 C60.+ 124.35,43.14 IC1.3
OFFSET
  Top 0.406: R17.2 77.79,47.63 82.87,52.7 | 82.87,52.7 82.87,55.88 C63.2 | 82.87,52.7 83.4,52.17 U$20.PRIMARY_BOTTOM 86.3,56.32 C68.+
PA_IN
  Top 0.406: R13.1 R14.1 86.65,48.26 U$20.PRIMARY_TOP
PA_OUT
  Top 0.406: U$3.1 U$2.1 46.4,69.85 U$1.1 | U$5.1 41.95,40.64 U$4.1 | 41.91,18.41 U$8.1 41.91,24.09 U$7.1 U$6.1
  Bottom 0.406: U$4.1 42.59,43.86 46.99,48.26 46.99,50.84 U$3.1 | U$1.1 47.03,73.07 52.07,78.11 52.07,85.72 56.57,85.72 U$21.PRIMARY_TOP | U$5.1 U$6.1
PB3  (via drill 0.41)
  Top 0.305: JP1.4 125.09,10.16 124.46,10.79 117.47,10.79 116.84,10.16 116.84,8.89 115.57,7.62 93.98,7.62 v93.34,6.99 | IC8.15 94.84,20.1 94.61,20.32 v93.34,20.32
  Bottom 0.305: v93.34,6.99 v93.34,20.32
PB4  (via drill 0.41)
  Top 0.305: IC8.16 96.13,19.3 v95.25,18.41
  Bottom 0.305: JP1.1 127.64,5.08 127,4.45 120.02,4.45 118.11,6.35 99.06,6.35 97.16,4.45 94.61,4.45 94.61,17.78 v95.25,18.41
PB5  (via drill 0.41)
  Top 0.305: IC8.17 100.58,16.76 100.33,16.51 99.69,16.51 99.69,17.14 99.06,17.78 97.79,17.78 96.52,16.51 v96.52,14.61 | v96.52,6.35 118.11,6.35 120.02,4.45 125.09,4.45 JP1.3
  Bottom 0.305: v96.52,14.61 v96.52,6.35
Q
  Top 0.406: C9.- 98.42,81.92 96.52,80.01 96.52,69.22 97.79,67.94 97.79,62.87 98.42,62.23 98.42,59.05 99.06,58.42 IC4.5 99.06,52.7 97.79,51.44 IC4.11
Q_IN
  Top 0.406: C58.- 130,82.72 131.93,80.8 U$23.3
RESET  (via drill 0.41)
  Top 0.305: IC8.29 112.76,22.5 v113.03,22.23 | v112.39,16.51 112.39,14.92 R19.2 | JP1.5 120.02,6.35 118.75,7.62 v117.47,7.62 | v113.03,26.04 118.3,26.04 C4.1
  Bottom 0.305: v117.47,7.62 117.47,16.51 v112.39,16.51 113.03,17.14 v113.03,22.23 v113.03,26.04
RX  (via drill 0.41)
  Top 0.305: IC8.30 117.91,23.3 v118.11,23.5 | IC5.5 118.47,19.41 118.11,19.05 v116.84,19.05
  Bottom 0.305: v118.11,23.5 118.11,20.32 v116.84,19.05
SCL  (via drill 0.41)
  Top 0.254: R16.1 79.69,20 v77.47,17.78 | v56.52,18.41 56.52,22.23 62.87,22.23 63,22.09 IC7.4
  Top 0.305: v111.12,10.79 104.78,10.79 104.14,10.16 82.55,10.16 R16.1 | IC8.28 110.38,21.7 111.76,20.32 v111.76,19.68
  Bottom 0.254: v77.47,17.78 73.03,17.78 72.39,17.14 57.78,17.14 v56.52,18.41
  Bottom 0.305: v111.76,19.68 111.76,17.78 111.12,17.14 v111.12,10.79
SDA  (via drill 0.41)
  Top 0.254: IC7.5 62.5,20.68 62.23,20.95 60.33,20.95 v59.05,19.68 | v85.09,19.05 87.31,19.05 R15.1
  Top 0.305: IC8.27 107.89,20.9 107.95,20.95 109.22,20.95 v109.86,20.32 | v104.14,8.89 88.27,8.89 v87.63,8.26 | v87.63,17.14 R15.1
  Bottom 0.254: 84.45,19.68 v85.09,19.05
  Bottom 0.305: v109.86,20.32 109.86,17.14 109.22,16.51 109.22,13.97 v104.14,8.89 | v87.63,8.26 v87.63,17.14 | v59.05,19.68 59.05,19.05 59.69,18.41 64.77,18.41 66.04,19.68 84.45,19.68
SI4F
  Top 0.254: IC7.10 64.5,14.88 64.77,14.61 66.67,14.61 68.58,16.51 68.58,29.84 | 74.3,30.48 IC6.3
  Top 0.305: IC6.3 71.75,30.48 71.12,31.11 69.22,31.11 68.58,30.48 68.58,29.84
  Top 0.406: 74.3,30.48 75.56,30.48 76.83,29.21 IC6.11
TX  (via drill 0.41)
  Top 0.305: IC8.31 111.73,24.1 112.39,24.77 v116.2,24.77 | IC5.1 117.06,22 v116.84,22.23
  Bottom 0.305: v116.2,24.77 116.2,22.86 v116.84,22.23
UC_VCC  (via drill 0.41)
  Top 0.305: IC5.17 125.98,14.86 125.09,13.97 | 125.09,13.97 125.09,12.7 125.73,12.06 127,12.06 127.64,11.43 JP1.2 | 125.09,13.97 123.19,13.97 121.28,12.06 109.22,12.06 v106.05,15.24 | v98.42,16.51 98.42,14.92 C53.1 99.69,14.61 101.38,16.29 IC8.18 101.38,20.1 102.18,20.9 IC8.6 102.23,26.33 102.23,24.13 103.5,24.13 103.78,24.4 IC8.4 103.78,28.21 107.31,31.75 C52.1
  Bottom 0.305: v106.05,15.24 99.69,15.24 v98.42,16.51

## Text on the board
Top: IQ-Modulator Bachelorarbeit | Pirmin Schöder | GND | GND